# Altium PCB Main.PcbDoc
Units mil, origin at the board's own origin, x right, y up, seen from the top; angles counter-clockwise.
Board outline 5800 x 5450 mil, 2 copper layers (Top Layer, Bottom Layer); 46 components, 93 nets, 342 pads, 3 vias.
Unrouted connection lines stored in the file: 96.
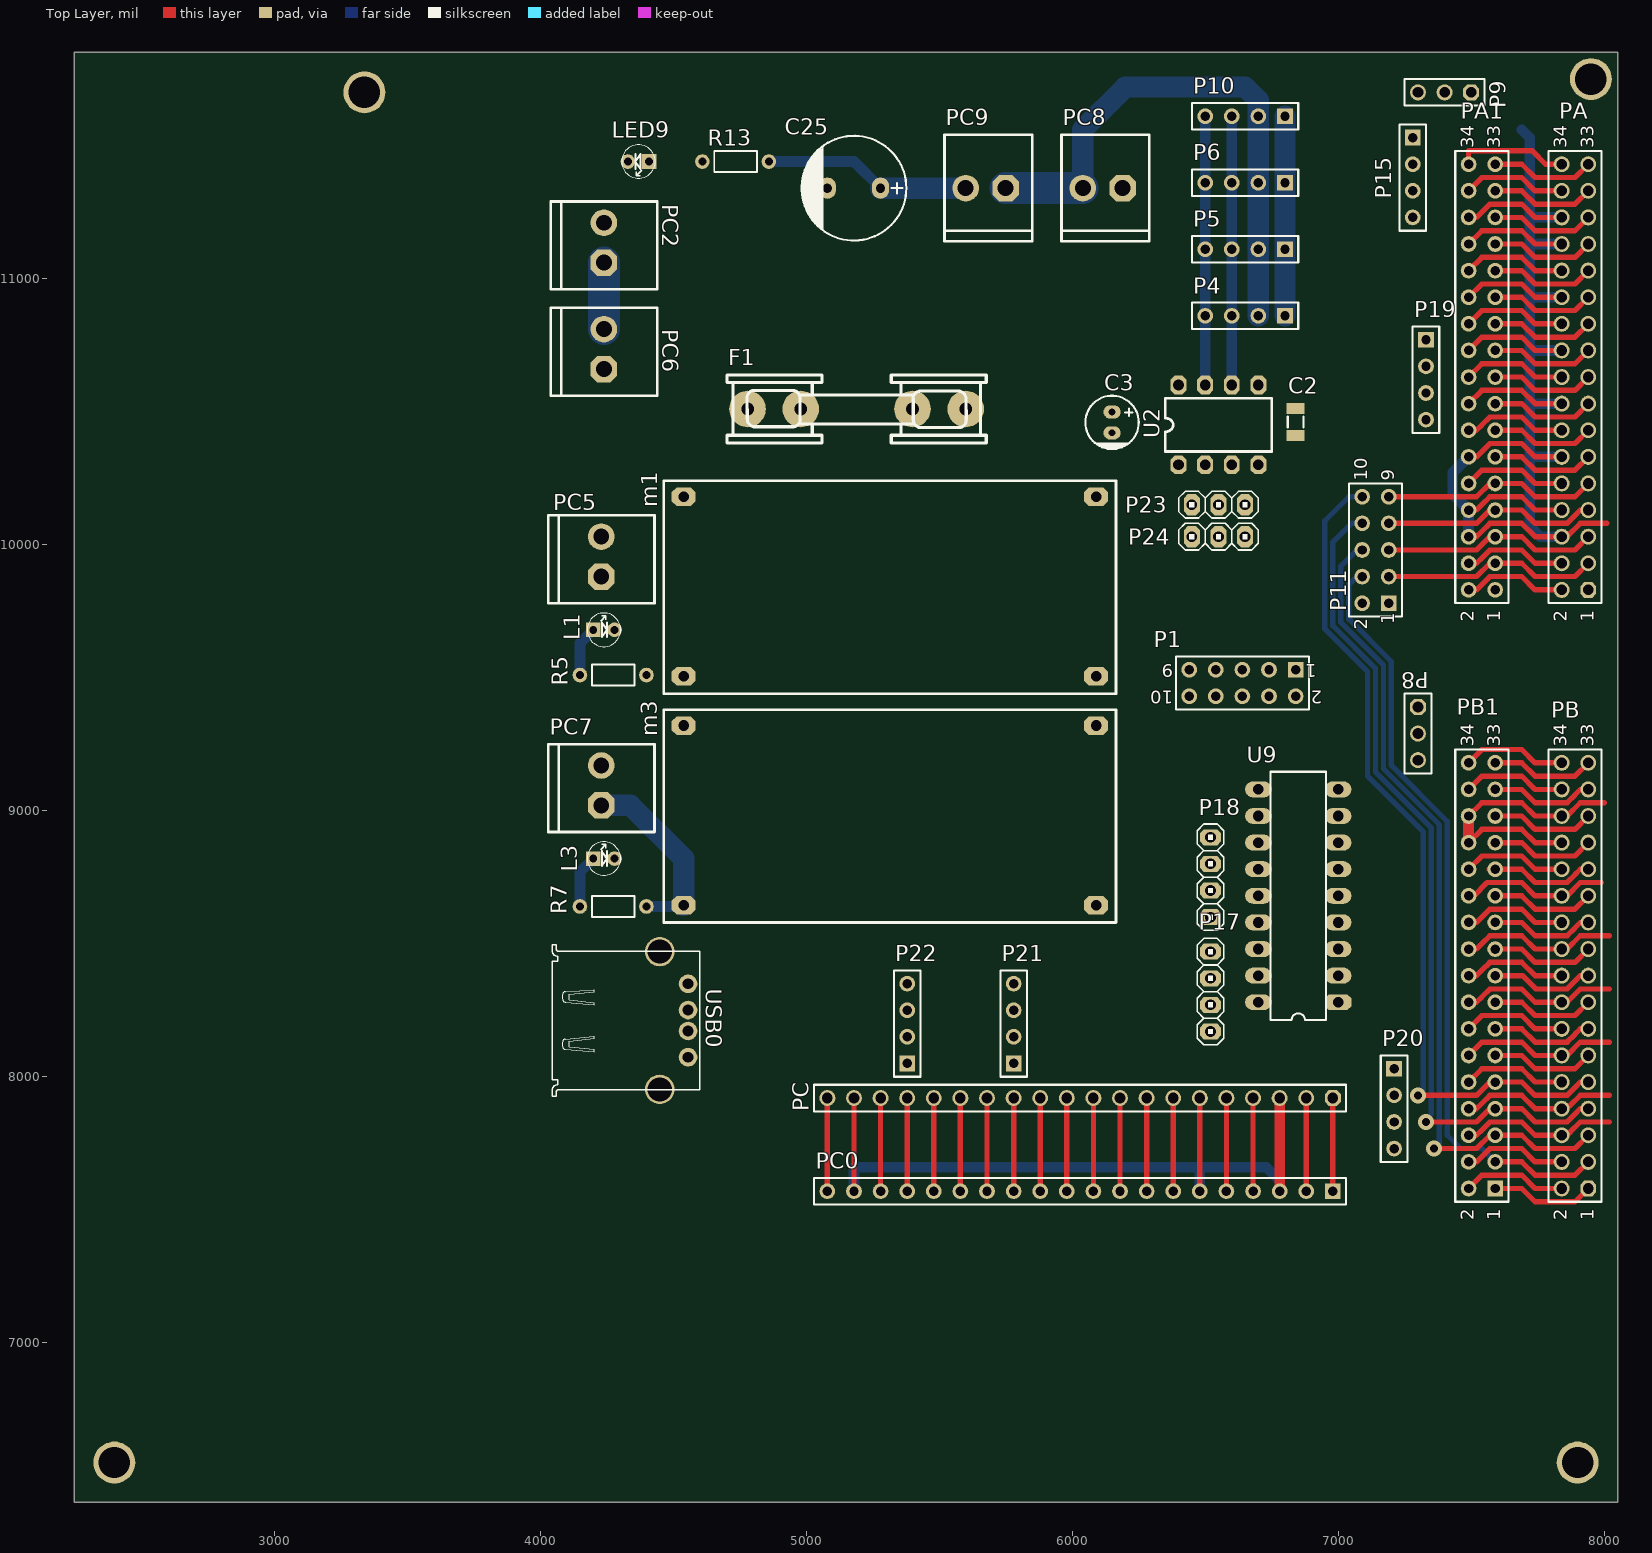
[diagram p0: Top Layer view]
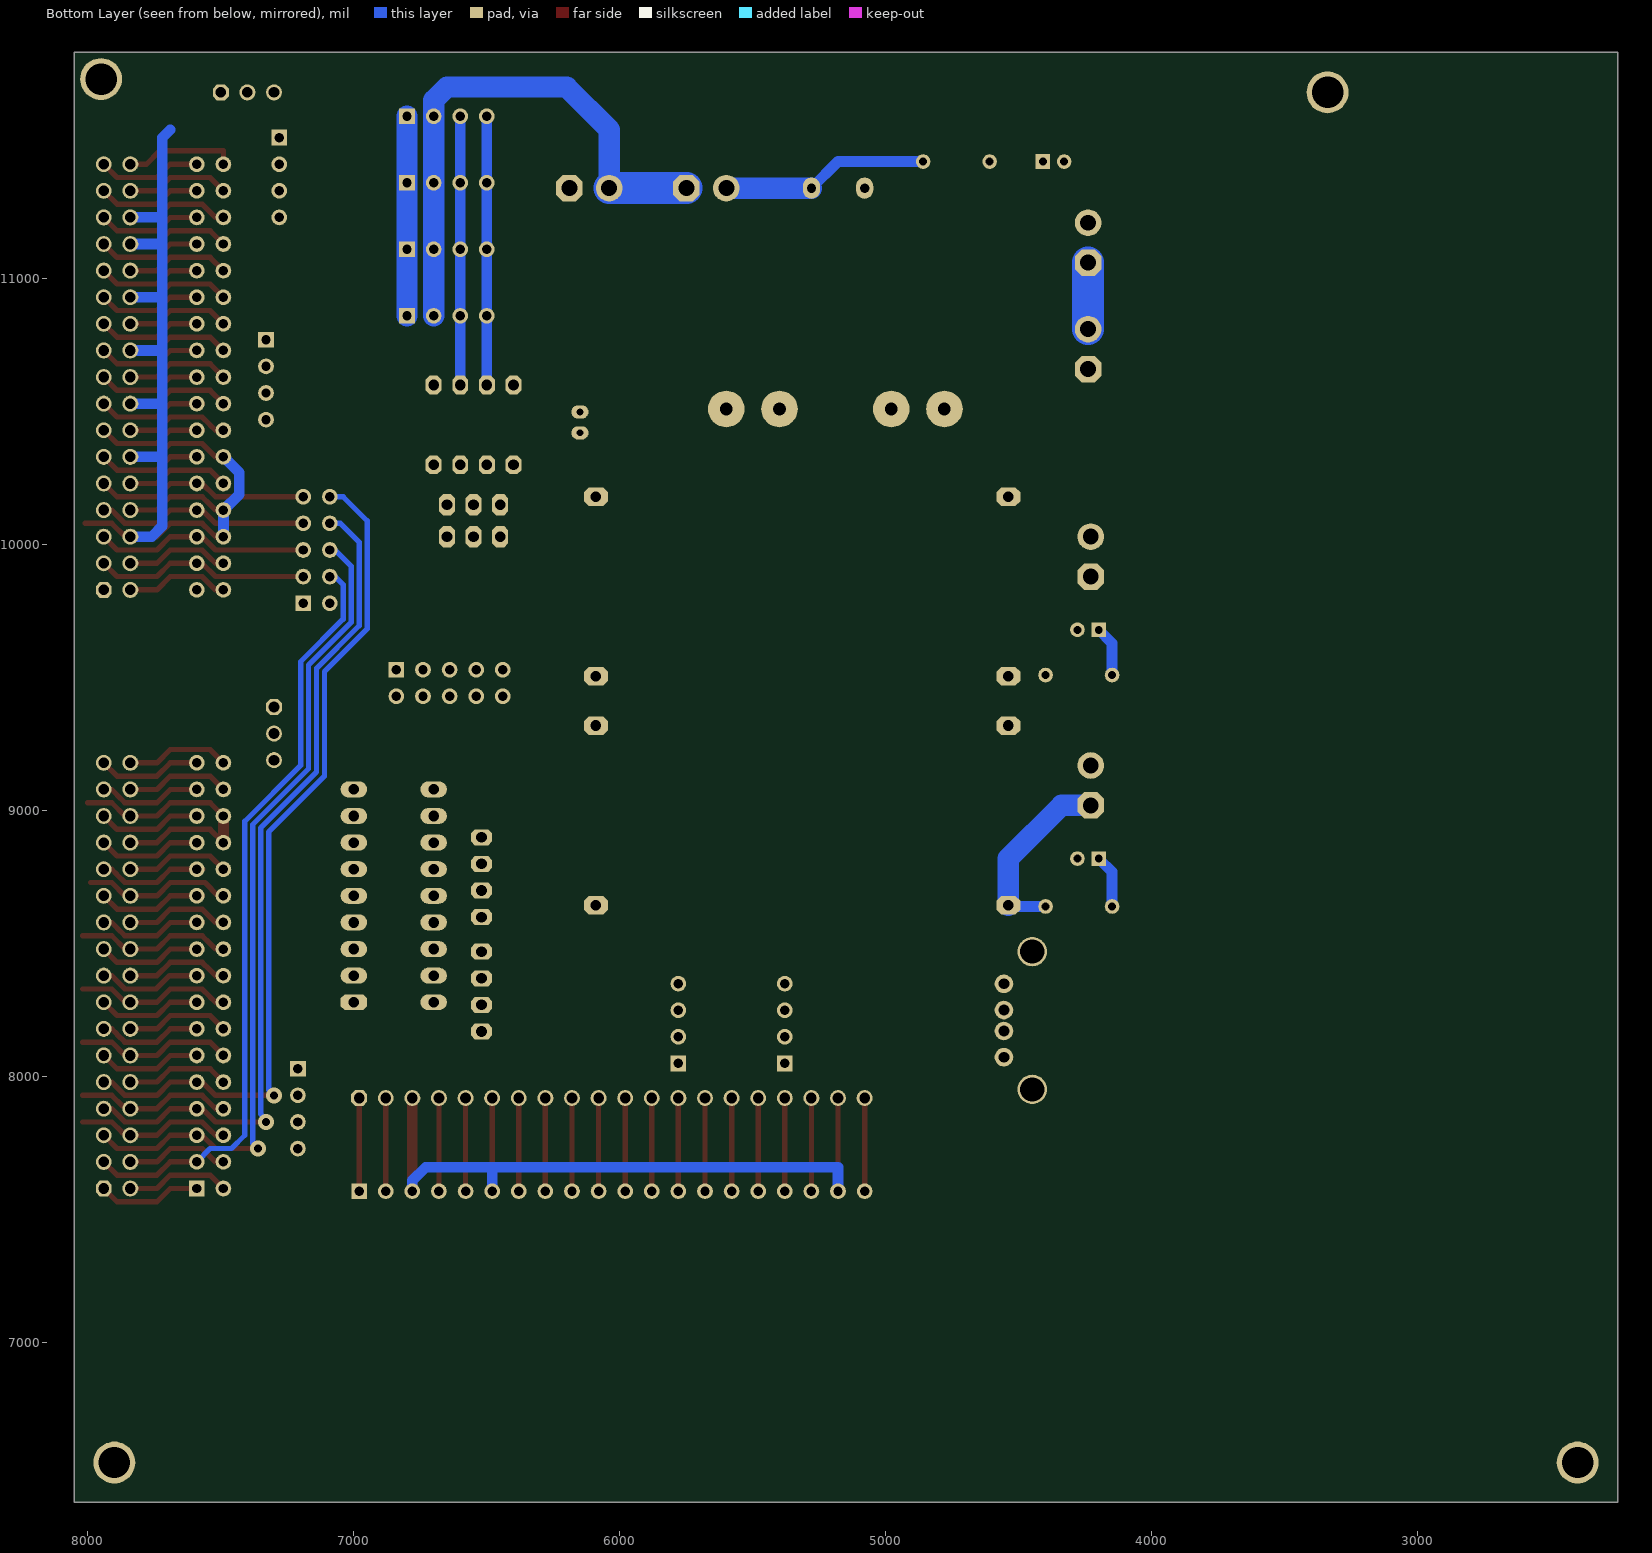
[diagram p1: Bottom Layer view, seen from below]

## Layer stack, top to bottom
Top Solder: solder mask 0.4, Solder Resist, Dk 3.5
Top Layer: signal copper 1.4
Dielectric 1: dielectric 12.6, FR-4, Dk 4.8
Bottom Layer: signal copper 1.4
Bottom Solder: solder mask 0.4, Solder Resist, Dk 3.5

## Board outline
2250,6400 8050,6400 8050,11850 2250,11850

## Design rules (kind name [scope] priority, off if disabled: settings)
Clearance [All] p1: gap=10 ignorepadtopadclearanceinfootprint=FALSE except(0: Arc-Hole Track-Hole SMDPad-Hole THPad-Hole Via-Hole Fill-Hole Poly-Hole Region-Hole Text-Hole)
PolygonConnect [All] p1: connectstyle=Relief reliefconductorwidth=10 reliefentries=4 polygonreliefangle="90 Angle" airgapwidth=10
RoutingVias [All] p1: holewidth=30 width=60 viastyle="Through Hole" minholewidth=30 minwidth=50 maxholewidth=50 maxwidth=100
SolderMaskExpansion [All] p1: expansion=4
Width [All] p1: maxlimit=120 minlimit=10 preferedwidth=40
30 further rules are at their usual default settings.

## Components (designator, comment, footprint, x,y, rotation, side; value= is the part's Value field where it differs from the comment)
C2 "100nF" SMD_CAP_1206 6840,10512.2 r270 top
C3 "1uF" "cap 01" 6150,10459.37 r90 top
C25 "1uF" "cap 04" 5180,11340 r0 top
F1 "FUSE" FUSE_1 5400,10510 r180 top
L1 "Red" LED-3mm 4240,9680 r0 top
L3 "Red" LED-3mm 4240,8820 r0 top
LED9 "Red" LED-3mm 4370,11440 r180 top
m1 "reg" reg-module 5315,9840 r180 top
m3 "reg" reg-module 5315,8980 r180 top
P1 "Header 5X2" HDR2X5 6840,9530 r180 top
P4 "Header 4" HDR1X4 6800,10860 r180 top
P5 "Header 4" HDR1X4 6800,11110 r180 top
P6 "Header 4" HDR1X4 6800,11360 r180 top
P8 "Header 3" HDR1X3 7300,9390 r270 top
P9 "Header 3" HDR1X3 7500,11700 r180 top
P10 "Header 4" HDR1X4 6800,11610 r180 top
P11 "Header 5X2" HDR2X5 7190,9780 r90 top
P13 "Header 6" HDR1X6 8710,9390 r90 top
P14 "Header 6" HDR1X6 8410,9390 r90 top
P15 "Header 4" HDR1X4 7280,11530 r270 top
P17 "Header 4" My_1X04 6520,8320 r90 top
P18 "Header 4" My_1X04 6520,8750 r90 top
P19 "Header 4" HDR1X4 7330,10770 r270 top
P20 "Header 4" HDR1X4 7210,8030 r270 top
P21 "Header 4" HDR1X4 5780,8050 r90 top
P22 "Header 4" HDR1X4 5380,8050 r90 top
P23 "Header 3" My_1X03 6550,10150 r180 top
P24 "Header 3" My_1X03 6550,10030 r180 top
PA "Header 17X2" HDR2X17#1 7940,9830 r90 top
PA1 "Header 17X2" HDR2X17#2 7590,9830 r90 top
PB "Header 17X2" HDR2X17#1 7940,7580 r90 top
PB1 "Header 17X2" HDR2X17#3 7590,7580 r90 top
PC "Header 20" HDR1X20#1 6980,7920 r180 top
PC0 "Header 20" HDR1X20#2 6980,7570 r180 top
PC2 "Power Connector" "My_ Power_Connector" 4040,10910 r90 top
PC5 "Power Connector" "My_ Power_Connector" 4030,9730 r90 top
PC6 "Power Connector" "My_ Power_Connector" 4040,10510 r90 top
PC7 "Power Connector" "My_ Power_Connector" 4030,8870 r90 top
PC8 "Power Connector" "My_ Power_Connector" 6340,11140 r180 top
PC9 "Power Connector" "My_ Power_Connector" 5900,11140 r180 top
R5 "1K" Res-(1/4) 4275,9510 r180 top
R7 "1K" Res-(1/4) 4275,8640 r180 top
R13 "1K" Res-(1/4) 4735,11440 r0 top
U2 "max_485" PCBComponent_1 6675,10000 r90 top
U9 "ULN2803" My_DIP-18 6849.5,8680.5 r90 top
USB0 "" 61400416021 4503.15,8211.34 r270 top

## Footprints (in the part's own frame and the unit in brackets; to place one, negate y for a bottom-side part, rotate by r counter-clockwise, add the part's x,y. Pads: shape width x height; smd on the part's side, far side on the other; paste and mask are expansions set on the pad)
61400416021 [mm] "4 pins"
  round 1.778 hole 1.016: 1(-3.5,1.35) 2(-1,1.35) 3(1,1.35) 4(3.5,1.35)
  round 2.8 hole 2.3: Z1(-6.57,-1.35) Z2(6.57,-1.35)
  silkscreen extent -7.25,-11.63 7.25,2.47, body extent -7.9,-11.63 7.9,2.47, height 7.71
"cap 01" [mil]
  oval 50x65 hole 25: 1(39.37,0) 2(-39.37,0)
  silkscreen extent -100,-100 100,100, body extent -99,-99 99,99, height 494
"cap 04" [mil]
  oval 65x80 hole 35: 1(100,0) 2(-100,0)
  silkscreen extent -197,-197 197,197, body extent -198,-197 198,199, height 513
FUSE_1 [mm]
  round 3.5 hole 1.2: 1(0,0) 2(10.668,0) ""(-5.08,0) ""(15.748,0)
  silkscreen extent -7.04,-3.25 17.7,3.25
HDR1X3 [mil] "Connector; Header; 3 Position"
  oct 60x60 hole 40 mask+4: 1(0,0)
  round 60 hole 40 mask+4: 2(100,0) 3(200,0)
  silkscreen extent -50,-50 250,50
HDR1X4 [mm] "Connector; Header; 4 Position"
  rect 1.5x1.5 hole 0.9: 1(0,0)
  round 1.5 hole 0.9: 2(2.54,0) 3(5.08,0) 4(7.62,0)
  silkscreen extent -1.27,-1.27 8.89,1.27
HDR1X6 [mm] "Connector; Header; 6 Position"
  rect 1.5x1.5 hole 0.9: 1(0,0)
  round 1.5 hole 0.9: 2(2.54,0) 3(5.08,0) 4(7.62,0) 5(10.16,0) 6(12.7,0)
  silkscreen extent -1.27,-1.27 13.97,1.27
HDR1X20#1 [mil] "Connector; Header; 20 Position"
  oct 60x60 hole 40 mask+4: 1(0,0)
  round 60 hole 40 mask+4: 2(100,0) 3(200,0) 4(300,0) 5(400,0) 6(500,0) 7(600,0) 8(700,0) 9(800,0) 10(900,0) 11(1000,0) 12(1100,0) 13(1200,0) 14(1300,0) 15(1400,0) 16(1500,0) 17(1600,0) 18(1700,0) 19(1800,0) 20(1900,0)
  silkscreen extent -50,-50 1950,50
HDR1X20#2 [mil] "Connector; Header; 20 Position"
  rect 59.06x59.06 hole 35.43: 1(0,0)
  round 59.06 hole 35.43: 2(100,0) 3(200,0) 4(300,0) 5(400,0) 6(500,0) 7(600,0) 8(700,0) 9(800,0) 10(900,0) 11(1000,0) 12(1100,0) 13(1200,0) 14(1300,0) 15(1400,0) 16(1500,0) 17(1600,0) 18(1700,0) 19(1800,0) 20(1900,0)
  silkscreen extent -50,-50 1950,50
HDR2X5 [mm] "Connector; Header; 5x2 Position"
  rect 1.5x1.5 hole 0.9: 1(0,0)
  round 1.5 hole 0.9: 2(0,2.54) 3(2.54,0) 4(2.54,2.54) 5(5.08,0) 6(5.08,2.54) 7(7.62,0) 8(7.62,2.54) 9(10.16,0) 10(10.16,2.54)
  silkscreen extent -1.27,-1.27 11.43,3.81
HDR2X17#1 [mil] "Connector; Header; 17x2 Position"
  oct 60x60 hole 40 mask+4: 1(0,0)
  round 60 hole 40 mask+4: 2(0,100) 3(100,0) 4(100,100) 5(200,0) 6(200,100) 7(300,0) 8(300,100) 9(400,0) 10(400,100) 11(500,0) 12(500,100) 13(600,0) 14(600,100) 15(700,0) 16(700,100) 17(800,0) 18(800,100) 19(900,0) 20(900,100) 21(1000,0) 22(1000,100) 23(1100,0) 24(1100,100) 25(1200,0) 26(1200,100) 27(1300,0) 28(1300,100) 29(1400,0) 30(1400,100) 31(1500,0) 32(1500,100) 33(1600,0) 34(1600,100)
  silkscreen extent -50,-50 1650,150
HDR2X17#2 [mil] "Connector; Header; 17x2 Position"
  round 59.06 hole 35.43: 1(0,0) 2(0,100) 3(100,0) 4(100,100) 5(200,0) 6(200,100) 7(300,0) 8(300,100) 9(400,0) 10(400,100) 11(500,0) 12(500,100) 13(600,0) 14(600,100) 15(700,0) 16(700,100) 17(800,0) 18(800,100) 19(900,0) 20(900,100) 21(1000,0) 22(1000,100) 23(1100,0) 24(1100,100) 25(1200,0) 26(1200,100) 27(1300,0) 28(1300,100) 29(1400,0) 30(1400,100) 31(1500,0) 32(1500,100) 33(1600,0) 34(1600,100)
  silkscreen extent -50,-50 1650,150
HDR2X17#3 [mil] "Connector; Header; 17x2 Position"
  rect 59.06x59.06 hole 35.43: 1(0,0)
  round 59.06 hole 35.43: 2(0,100) 3(100,0) 4(100,100) 5(200,0) 6(200,100) 7(300,0) 8(300,100) 9(400,0) 10(400,100) 11(500,0) 12(500,100) 13(600,0) 14(600,100) 15(700,0) 16(700,100) 17(800,0) 18(800,100) 19(900,0) 20(900,100) 21(1000,0) 22(1000,100) 23(1100,0) 24(1100,100) 25(1200,0) 26(1200,100) 27(1300,0) 28(1300,100) 29(1400,0) 30(1400,100) 31(1500,0) 32(1500,100) 33(1600,0) 34(1600,100)
  silkscreen extent -50,-50 1650,150
LED-3mm [mil]
  rect 55x55 hole 30: 1(-40,0)
  round 55 hole 30: 2(40,0)
  silkscreen extent -63,-63 63,63, body extent -69,-69 69,69, height 154
My_1X03 [mil]
  oct 60x80 hole 40: 1(-100,0) 2(0,0) 3(100,0)
  silkscreen extent -150,-50 150,50
My_1X04 [mil]
  oct 60x80 hole 40: 1(-150,0) 2(-50,0) 3(50,0) 4(150,0)
  silkscreen extent -200,-50 200,50
"My_ Power_Connector" [mil]
  oct 100x100 hole 60: 1(150,-200)
  round 100 hole 60: 2(300,-200)
  silkscreen extent 50,-400 380,0
My_DIP-18 [mil]
  oct 60x100 hole 40: 1(-400.5,-150.5)
  oval 60x100 hole 40: 2(-300.5,-150.5) 3(-200.5,-150.5) 4(-100.5,-150.5) 5(-0.5,-150.5) 6(99.5,-150.5) 7(199.5,-150.5) 8(299.5,-150.5) 9(399.5,-150.5) 10(399.5,149.5) 11(299.5,149.5) 12(199.5,149.5) 13(99.5,149.5) 14(-0.5,149.5) 15(-100.5,149.5) 16(-200.5,149.5) 17(-300.5,149.5) 18(-400.5,149.5)
  silkscreen extent -467,-105 466,104
PCBComponent_1 [mil]
  oct 70x60 hole 40: 1(300,275) 2(300,175) 3(300,75) 4(300,-25) 5(600,-25) 6(600,75) 7(600,175) 8(600,275)
  silkscreen extent 350,-75 550,325
reg-module [mil]
  oct 90x70 hole 40: 1(-775,335) 2(-775,-340) 3(775,335) 4(775,-340)
  silkscreen extent -850,-400 850,400
Res-(1/4) [mil]
  round 55 hole 30: 1(-125,0) 2(125,0)
  silkscreen extent -80,-40 80,40, body extent -135,-36 135,36, height 115
SMD_CAP_1206 [mm]
  rect 1.05x1.7 smd: 1(0,0) 2(2.596,0)
  silkscreen extent 0.8,-0.75 1.8,0.75, body extent -0.22,-0.77 2.82,0.75, height 0.75

## Part data
C2: library part Cap-Bipolar, "Bipolar Capacitor", Voltage=100V, Adding Date=1387/12/20, Designer="Saeid Jorablo", Organazation=ControTec
C3 C25: library part Cap-Polar, "Polar Capacitor", Voltage=16V, Adding Date=1387/12/20, Designer="Saeid Jorablo", Organazation=ControTec
L1 L3 LED9: library part LED, "LED", Adding Date=1387/12/22, Color=Red, Designer="Saeid Jorablo", Organazation=ControTec, Size="SMD 1206"
m1 m3: library part Component_1
P1 P11: "Header, 5-Pin, Dual row", LatestRevisionDate=17-Jul-2002, LatestRevisionNote="Re-released for DXP Platform.", Publisher="Altium Limited"
P4 P5 P6 P10 P15 P17 P18 P19 P20 P21 P22: "Header, 4-Pin", LatestRevisionDate=17-Jul-2002, LatestRevisionNote="Re-released for DXP Platform.", Publisher="Altium Limited"
P8 P9 P23 P24: "Header, 3-Pin", LatestRevisionDate=17-Jul-2002, LatestRevisionNote="Re-released for DXP Platform.", Publisher="Altium Limited"
P13 P14: "Header, 6-Pin", LatestRevisionDate=17-Jul-2002, LatestRevisionNote="Re-released for DXP Platform.", Publisher="Altium Limited"
PA PA1 PB PB1: "Header, 17-Pin, Dual row", LatestRevisionDate=17-Jul-2002, LatestRevisionNote="Re-released for DXP Platform.", Publisher="Altium Limited"
PC PC0: "Header, 20-Pin", LatestRevisionDate=17-Jul-2002, LatestRevisionNote="Re-released for DXP Platform.", Publisher="Altium Limited"
PC2 PC5 PC6 PC7 PC8 PC9: "white Power Connector"
R5 R7 R13: library part Resistor, "Resistor", Power="1/8 W", Tolerance=5%
U9: "HIGH-VOLTAGE,HIGH-CURRENT DARLINTON ARRAYS"
USB0: library part "WE-Communication Connectors 61400416021", "WR-COM USB RA Type A", Manufacturer="Würth Elektronik eiSos GmbH", partNo=61400416021, ComponentLink1 Description=Manufacturer, ComponentLink1URL=http://www.we-online.de, ComponentLink2 Description=Datasheet, ComponentLink2URL=http://katalog.we-online.de/em/datasheet/61400416021.pdf, Created by="Karrer Zheng", Created Date=10/10/2014, NoPins=4

## Free pads (board coordinates)
  round 157.48 hole 118.11: 2(3340,11700) 3(2400,6550) 3(7900,6550) 3(7950,11750)

## Via types
v1: diameter 60, hole 30, Top Layer to Bottom Layer, 3 vias

## Nets (pads, with @x,y where several pads share a name; then routed paths per layer and width w, separated by ;. In a path a pad name is that pad's centre, name@x,y a point inside that pad or via, vN(x,y) a via of type N, cw(c..) or ccw(c..) an arc to the next point about the centre after c; other vN are vias at no path point)
3.3-A: PA1.33 PA.33 | length 391.4
  Top Layer w20: PA1.33 7690,11430 7740,11380 7890,11380 PA.33
3.3-B: PB1.33 PB.33 | length 391.4
  Top Layer w20: PB1.33 7690,9180 7740,9130 7890,9130 PB.33
15-C: PC0.1 PC.1 | length 350
  Top Layer w20: PC0.1 PC.1
-15-C: PC0.2 PC.2 | length 350
  Top Layer w20: PC0.2 PC.2
A0-A: PA1.2 PA.2 | length 391.4
  Top Layer w20: PA1.2 7520,9830 7540.47,9850.47 ; 7540.47,9850.51 7569.96,9880 7690,9880 7740,9830 PA.2
A0-B: PB1.2 PB.2 | length 391.4
  Top Layer w20: PB1.2 7540,7630 7690,7630 7740,7580 PB.2
A0-C: PC0.4 PC.4 | length 350
  Top Layer w20: PC0.4 PC.4
A1-A: PA1.4 PA.4 | length 391.4
  Top Layer w20: PA1.4 7520,9930 7540.47,9950.47 ; 7540.47,9950.51 7569.96,9980 7690,9980 7740,9930 PA.4
A1-B: PB1.4 PB.4 | length 391.4
  Top Layer w20: PB1.4 7520,7680 7540.47,7700.47 ; 7540.47,7700.52 7569.96,7730 7690,7730 7740,7680 PB.4
A1-C: PC0.5 PC.5 | length 350
  Top Layer w20: PC0.5 PC.5
A+0-C: PC0.7 PC.7 | length 350
  Top Layer w20: PC0.7 PC.7
A+1-C: PC0.9 PC.9 | length 350
  Top Layer w20: PC0.9 PC.9
A-0-C: PC0.8 PC.8 | length 350
  Top Layer w20: PC0.8 PC.8
A-1-C: PC0.10 PC.10 | length 350
  Top Layer w20: PC0.10 PC.10
D1-C: PC0.12 PC.12 | length 350
  Top Layer w20: PC0.12 PC.12
D2-A: PA1.15 PA.15 | length 411.4
  Top Layer w20: PA1.15@7570,10530 PA1.15 7690,10530 7740,10480 7890,10480 PA.15
D2-B: PB1.15 PB.15 U9.1 | length 391.4
  Top Layer w20: PB1.15 7690,8280 7740,8230 7890,8230 PB.15
D3-A: PA1.17 PA.17 | length 391.4
  Top Layer w20: PA1.17 7690,10630 7740,10580 7890,10580 PA.17
D3-B: PB1.17 PB.17 U9.2 | length 411.8
  Top Layer w20: PB1.17@7570,8380 PB1.17 7692.82,8380 7742.82,8330 7860.71,8330 7890,8359.29 7890,8360 7910,8380 PB.17
D3-C: PC0.14 PC.14 | length 350
  Top Layer w20: PC0.14 PC.14
d4-A: PA1.19 PA.19 | length 391.4
  Top Layer w20: PA1.19 7690,10730 7740,10680 7890,10680 PA.19
D4-B: PB1.19 PB.19 U9.3 | length 411.4
  Top Layer w20: PB1.19@7570,8480 PB1.19 7690,8480 7740,8430 7890,8430 PB.19
D5-A: PA1.21 PA.21 | length 391.4
  Top Layer w20: PA1.21 7690,10830 7740,10780 7890,10780 PA.21
D5-B: PB1.21 PB.21 U9.4 | length 411.8
  Top Layer w20: PB1.21@7570,8580 PB1.21 7690,8580 7740,8530 7860.71,8530 7890,8559.29 7890,8560 7910,8580 PB.21
D5-C: PC0.16 PC.16 | length 350
  Top Layer w20: PC0.16 PC.16
D6-A: PA1.23 PA.23 | length 391.4
  Top Layer w20: PA1.23 7690,10930 7740,10880 7890,10880 PA.23
D6-B: PB1.23 PB.23 U9.5 | length 411.4
  Top Layer w20: PB1.23@7570,8680 PB1.23 7690,8680 7740,8630 7890,8630 PB.23
D7-A: PA1.25 PA.25 | length 391.4
  Top Layer w20: PA1.25 7690,11030 7740,10980 7890,10980 PA.25
D7-B: PB1.25 PB.25 U9.6 | length 414.3
  Top Layer w20: PB1.25@7567.57,8780 PB1.25 7690,8780 7740,8730 7860.71,8730 7890,8759.29 7890,8760 7910,8780 PB.25
D7-C: PC0.18 PC.18 | length 350
  Top Layer w20: PC0.18 PC.18
D13-A: P24.2 PA1.26 PA.26 | length 391.4
  Top Layer w20: PA1.26 7540,11080 7690,11080 7740,11030 PA.26
D13-B: PB1.26 PB.26 | length 391.4
  Top Layer w20: PB1.26 7540,8830 7690,8830 7740,8780 PB.26
GND: C2.2 C3.2 C25.2 L1.2 L3.2 LED9.2 m1.2 m3.2 P1.2 P4.1 P5.1 P6.1 P8.3 P9.3 P10.1 P11.2 P13.1 P14.1 P15.4 P19.3 P20.3 P21.3 P22.3 PA1.6 PA1.8 PA1.12 PA1.16 PA1.20 PA1.24 PA1.28 PA1.30 PA.6 PA.8 PA.12 PA.16 PA.20 PA.24 PA.28 PA.30 PB1.6 PB1.8 PB1.12 PB1.16 PB1.20 PB1.24 PB1.28 PB1.30 PB.6 PB.8 PB.12 PB.16 PB.20 PB.24 PB.28 PB.30 PC0.3 PC0.6 PC0.19 PC2.2 PC8.1 PC.3 PC.6 PC.19 U2.5 U9.9 | length 14562.2
  Top Layer w20: PC0.19 PC.19 ; PC0.6 PC.6 ; PB1.6 7520,7780 7540.47,7800.47 ; PB1.8 7520,7880 7540.47,7900.47 ; PB1.12 7540,8130 7690,8130 7740,8080 PB.12 7860,8080 7910,8130 8020,8130 ; PB1.16 7520,8280 7540.47,8300.47 ; PB1.20 7520,8480 7540.47,8500.47 ; PB1.24 7510,8680 7560,8730 7690,8730 7740,8680 PB.24 7860,8680 7910,8730 7990,8730 ; PB1.28 7540,8930 7690,8930 7740,8880 PB.28 ; PB1.30 7540,9030 7690,9030 7740,8980 PB.30 7860,8980 7910,9030 8000,9030 ; PA1.6 7520,10030 7540.47,10050.47 ; PA1.8 7520,10130 7540.47,10150.47 ; PA1.12 7520,10330 7540.47,10350.47 ; PA1.16 7540,10580 7690,10580 7740,10530 PA.16 ; PA1.20 7540,10780 7690,10780 7740,10730 PA.20 ; PA1.24 7540,10980 7690,10980 7740,10930 PA.24 ; PA1.28 7540,11180 7690,11180 7740,11130 PA.28 ; PA1.30 7520,11230 7540.47,11250.47 ; 7540.47,7800.52 7569.96,7830 7690,7830 7740,7780 PB.6 7850,7790 7870,7790 7910,7830 8020,7830 ; 7540.47,7900.52 7569.96,7930 7690,7930 7740,7880 PB.8 7850,7890 7870,7890 7910,7930 8020,7930 ; 7540.47,8300.51 7569.96,8330 7690,8330 7740,8280 PB.16 7860,8280 7910,8330 8020,8330 ; 7540.47,8500.51 7569.96,8530 7690,8530 7740,8480 PB.20 7860,8480 7910,8530 8020,8530 ; 7540.47,10050.51 7569.96,10080 7690,10080 7740,10030 PA.6 7860,10030 7910,10080 8010,10080 ; 7540.47,10150.51 7569.96,10180 7690,10180 7740,10130 PA.8 ; 7540.47,10350.51 7569.96,10380 7690,10380 7740,10330 PA.12 ; 7540.47,11250.51 7569.96,11280 7690,11280 7740,11230 PA.30
  Top Layer w40: PC0.3 PC.3 ; PB1.28 PB1.30 ; P14.1 P13.1
  Bottom Layer w40: PC0.19 5180,7660 6480,7660 ; PC0.6 6480,7660 ; PC0.3 6780,7610 6730,7660 6480,7660 ; PA1.6 PA1.8 7430,10190 7430,10270 PA1.12 ; 7690,11560 7720,11530 7720,11230 ; PA.6 7760,10030 7720,10070 7720,10330 ; PA.12 7720,10330 ; PA.16 7730,10530 7720,10540 ; PA.20 7720,10730 ; PA.24 7720,10930 ; PA.28 7720,11130 ; PA.30 7720,11230 ; 7720,10330 7720,10540 ; 7720,10540 7720,10730 ; 7720,10730 7720,10930 ; 7720,10930 7720,11130 ; 7720,11130 7720,11230
  Bottom Layer w80: P4.1 P5.1 P6.1 P10.1
m1-A: P19.2 PA1.18 PA.18 | length 391.4
  Top Layer w20: PA1.18 7540,10680 7690,10680 7740,10630 PA.18
m1-B: P19.1 PA1.22 PA.22 | length 391.4
  Top Layer w20: PA1.22 7540,10880 7690,10880 7740,10830 PA.22
m1-D: P1.5 P1.9 PA1.11 PA.11 | length 391.4
  Top Layer w20: PA1.11 7690,10330 7740,10280 7890,10280 PA.11
m1-P: P1.3 P1.7 PA1.27 PA.27 | length 391.4
  Top Layer w20: PA1.27 7690,11130 7740,11080 7890,11080 PA.27
m2-A: P20.2 PB1.18 PB.18 | length 391.4
  Top Layer w20: PB1.18 7520,8380 7540.47,8400.47 ; 7540.47,8400.51 7569.96,8430 7690,8430 7740,8380 PB.18
m2-B: P20.1 PB1.22 PB.22 | length 391.4
  Top Layer w20: PB1.22 7519.96,8580 7569.96,8630 7690,8630 7740,8580 PB.22
m2-D: PA1.13 PA.13 | length 411.4
  Top Layer w20: PA1.13@7570,10430 PA1.13 7690,10430 7740,10380 7890,10380 PA.13
m2-P: PA1.29 PA.29 | length 391.4
  Top Layer w20: PA1.29 7690,11230 7740,11180 7890,11180 PA.29
m3-A: P21.2 PC0.11 PC.11 | length 350
  Top Layer w20: PC0.11 PC.11
m3-B: P21.1 PC0.13 PC.13 | length 350
  Top Layer w20: PC0.13 PC.13
m3-D: P1.6 PB1.11 PB.11 | length 391.4
  Top Layer w20: PB1.11 7690,8080 7740,8030 7890,8030 PB.11
m3-P: P1.4 PB1.27 PB.27 | length 391.4
  Top Layer w20: PB1.27 7690,8880 7740,8830 7890,8830 PB.27
m4-A: P22.2 PC0.15 PC.15 | length 350
  Top Layer w20: PC0.15 PC.15
m4-B: P22.1 PC0.17 PC.17 | length 350
  Top Layer w20: PC0.17 PC.17
m4-D: P1.10 PB1.13 PB.13 | length 391.8
  Top Layer w20: PB1.13 7690,8180 7740,8130 7860.71,8130 7890,8159.29 7890,8160 7910,8180 PB.13
m4-P: P1.8 PB1.29 PB.29 | length 391.4
  Top Layer w20: PB1.29 7690,8980 7740,8930 7890,8930 PB.29
NetF1_2: F1.2 PC6.1
NetL1_1: L1.1 R5.2 | length 190.7
  Bottom Layer w40: R5.2 4150,9630 L1.1
NetL3_1: L3.1 R7.2 | length 200.7
  Bottom Layer w40: R7.2 4150,8770 L3.1
NetLED9_1: LED9.1 R13.1
Netm1_4: m1.4 PC5.2
Netm3_4: m3.4 PC7.2 USB0.4
NetP4_3: P4.3 P5.3 P6.3 P10.3 U2.6 | length 1010
  Bottom Layer w40: U2.6 P4.3 P5.3 P6.3 P10.3
NetP4_4: P4.4 P5.4 P6.4 P10.4 U2.7 | length 1010
  Bottom Layer w40: U2.7 P4.4 P5.4 P6.4 P10.4
NetP17_2: P17.2 U9.18
NetP17_3: P17.3 U9.17
NetP17_4: P17.4 U9.16
NetP18_1: P18.1 U9.15
NetP18_2: P18.2 U9.14
NetP18_3: P18.3 U9.13
NetP23_1: P23.1 U2.4
NetP23_2: P23.2 U2.2 U2.3
NetP23_3: P23.3 U2.1
NetPC2_1: PC2.1 PC6.2 | length 250
  Bottom Layer w120: PC6.2 PC2.1
NetUSB0_2: USB0.2 USB0.3
Rx-A: P24.3 PA1.10 PA.10 | length 391.4
  Top Layer w20: PA1.10 7540,10280 7690,10280 7740,10230 PA.10
Rx-B: PB1.10 PB.10 | length 391.4
  Top Layer w20: PB1.10 7540,8030 7690,8030 7740,7980 PB.10
SCL-A: P15.3 PA1.32 PA.32 | length 391.4
  Top Layer w20: PA1.32 7540,11380 7690,11380 7740,11330 PA.32
SCL-B: P13.3 P14.3 PB1.32 PB.32 | length 391.4
  Top Layer w20: PB1.32 7540,9130 7690,9130 7740,9080 PB.32
SDA-A: P15.2 PA1.34 PA.34 | length 420.7
  Top Layer w20: PA1.34 7490,11480 7730,11480 7780,11430 PA.34
SDA-B: P13.2 P14.2 PB1.34 PB.34 | length 391.4
  Top Layer w20: PB1.34 7540,9230 7690,9230 7740,9180 PB.34
Servo-1: P9.1 PA1.31 PA.31 | length 391.4
  Top Layer w20: PA1.31 7690,11330 7740,11280 7890,11280 PA.31
Servo-2: P8.1 PB1.31 PB.31 | length 391.8
  Top Layer w20: PB1.31 7690,9080 7740,9030 7860.71,9030 7890,9059.29 7890,9060 7910,9080 PB.31
sharp-1: P11.3 PA1.3 PA.3 | length 812.1
  Top Layer w20: P11.3 7520,9880 7570,9930 PA1.3 7690,9930 7740,9880 7890,9880 PA.3
sharp-2: P11.5 PA1.5 PA.5 | length 812.1
  Top Layer w20: P11.5 7520,9980 7570,10030 PA1.5 7690,10030 7740,9980 7890,9980 PA.5
sharp-3: P11.7 PA1.7 PA.7 | length 812.5
  Top Layer w20: P11.7 7520,10080 7570,10130 PA1.7 7690,10130 7740,10080 7860.71,10080 7890,10109.29 7890,10110 7910,10130 PA.7
sharp-4: P11.9 PA1.9 PA.9 | length 812.1
  Top Layer w20: P11.9 7520,10180 7570,10230 PA1.9 7690,10230 7740,10180 7890,10180 PA.9
sharp-5: P11.4 PB1.3 PB.3 | length 2898.5
  Top Layer w20: PB1.3 7690,7680 7740,7630 7890,7630 PB.3
  Bottom Layer w20: P11.4 7070,9880 7040,9850 7040,9720 7200,9560 7200,9170 7410,8960 7410,7780 7460,7730 7540,7730 PB1.3
sharp-6: P11.6 PB1.5 PB.5 | length 3098.5
  Top Layer w20: v1(7360,7730) 7520,7730 7570,7780 PB1.5 7690,7780 7740,7730 7890,7730 PB.5
  Bottom Layer w20: P11.6 7070,9980 7010,9920 7010,9707.57 7170,9547.57 7170,9157.57 7380,8947.57 7380,7750 v1(7360,7730)
sharp-7: P11.8 PB1.7 PB.7 | length 3153.1
  Top Layer w20: v1(7330,7830) 7520,7830 7570,7880 PB1.7 7690,7880 7740,7830 7860.71,7830 7890,7859.29 7890,7860 7910,7880 PB.7
  Bottom Layer w20: P11.8 7050,10080 6980,10010 6980,9695.15 7140,9535.15 7140,9145.15 7350,8935.15 7350,7860 7330,7840 v1(7330,7830)
sharp-8: P11.10 PB1.9 PB.9 | length 3201.4
  Top Layer w20: v1(7300,7930) 7520,7930 7570,7980 PB1.9 7690,7980 7740,7930 7860.71,7930 7890,7959.29 7890,7960 7910,7980 PB.9
  Bottom Layer w20: P11.10 7040,10180 6950,10090 6950,9682.72 7110,9522.72 7110,9130 7320,8920 7320,7950 v1(7300,7930)
Tx-A: P24.1 PA1.14 PA.14 | length 391.4
  Top Layer w20: PA1.14 7520,10430 7540.47,10450.47 ; 7540.47,10450.51 7569.96,10480 7690,10480 7740,10430 PA.14
Tx-B: PB1.14 PB.14 | length 391.4
  Top Layer w20: PB1.14 7540,8230 7690,8230 7740,8180 PB.14
VCC: m1.3 P1.1 P11.1 P13.6 P14.6 PC5.1 R5.1
VCC-A: C2.1 C3.1 P15.1 P19.4 PA1.1 PA.1 U2.8
VCC-B: P20.4 PB1.1 PB.1 | length 391.4
  Top Layer w20: PB1.1 7690,7580 7740,7530 7890,7530 PB.1
VCC-C: P21.4 P22.4 PC0.20 PC.20 | length 350
  Top Layer w20: PC0.20 PC.20
Vcc_out: m3.3 P8.2 P9.2 PC7.1 R7.1 USB0.1 | length 709.9
  Bottom Layer w40: R7.1 4535,8640 m3.3
  Bottom Layer w80: PC7.1 4340,9020 4540,8820 m3.3
Vs: C25.1 F1.1 m1.1 m3.1 P17.1 P18.4 PC9.2 R13.2 U9.10 | length 781.4
  Bottom Layer w40: R13.2 5180,11440 C25.1
  Bottom Layer w80: C25.1 PC9.2
vs-S: P4.2 P5.2 P6.2 P10.2 PC8.2 PC9.1 | length 2067
  Bottom Layer w80: PC8.2 6040,11560 6200,11720 6650,11720 6700,11670 P10.2 P6.2 P5.2 P4.2
  Bottom Layer w120: PC9.1 PC8.2
pads on no net: F1. P13.4 P13.5 P14.4 P14.5 U9.7 U9.8 U9.11 U9.12 USB0.Z1 USB0.Z2
copper on no net: | length 214.6
  Bottom Layer w60: -1958.2,2868.97 -1932.18,2895 -1915,2895 -1891.03,2918.97 -1871.6,2918.97 -1851.03,2918.97 -1825,2945 -1808.97,2945 -1785,2968.97

## Text inside footprints (layer, text, board x,y; h text height)
P1: Top Overlay "10" at 6380,9450 h50 r180; Top Overlay "9" at 6380,9550 h50 r180; Top Overlay "1" at 6920,9550 h50 r180; Top Overlay "2" at 6940,9450 h50 r180
P11: Top Overlay "2" at 7110,9680 h50 r90; Top Overlay "1" at 7210,9700 h50 r90; Top Overlay "9" at 7210,10240 h50 r90; Top Overlay "10" at 7110,10240 h50 r90
PA: Top Overlay "2" at 7860,9710 h50 r90; Top Overlay "1" at 7960,9710 h50 r90; Top Overlay "33" at 7960,11490 h50 r90; Top Overlay "34" at 7860,11490 h50 r90
PA1: Top Overlay "2" at 7510,9710 h50 r90; Top Overlay "1" at 7610,9710 h50 r90; Top Overlay "33" at 7610,11490 h50 r90; Top Overlay "34" at 7510,11490 h50 r90
PB: Top Overlay "2" at 7860,7460 h50 r90; Top Overlay "1" at 7960,7460 h50 r90; Top Overlay "33" at 7960,9240 h50 r90; Top Overlay "34" at 7860,9240 h50 r90
PB1: Top Overlay "2" at 7510,7460 h50 r90; Top Overlay "1" at 7610,7460 h50 r90; Top Overlay "33" at 7610,9240 h50 r90; Top Overlay "34" at 7510,9240 h50 r90